# Altium PCB Buffer.PcbDoc
Units mm, origin at the board's own origin, x right, y up, seen from the top; angles counter-clockwise.
Board outline 23.37 x 19.3 mm, 2 copper layers (Top Layer, Bottom Layer); 9 components, 7 nets, 25 pads, 1 vias.
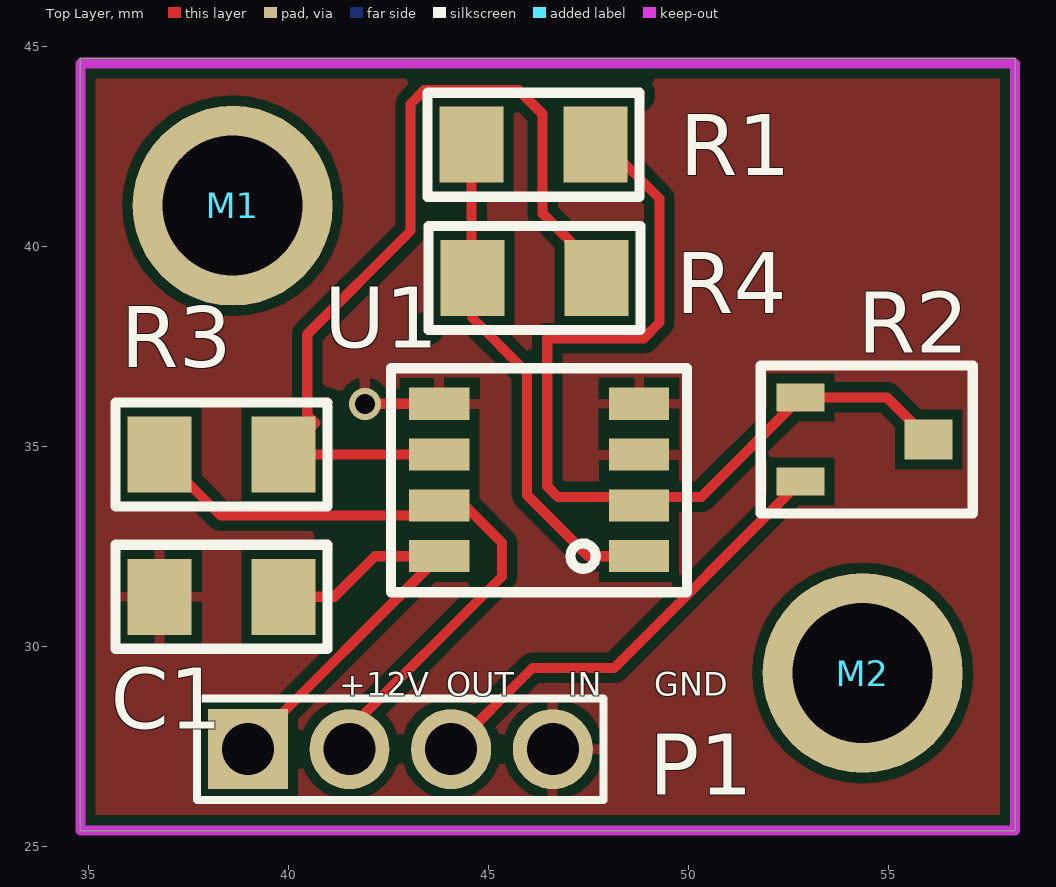
[diagram p0: Top Layer view]
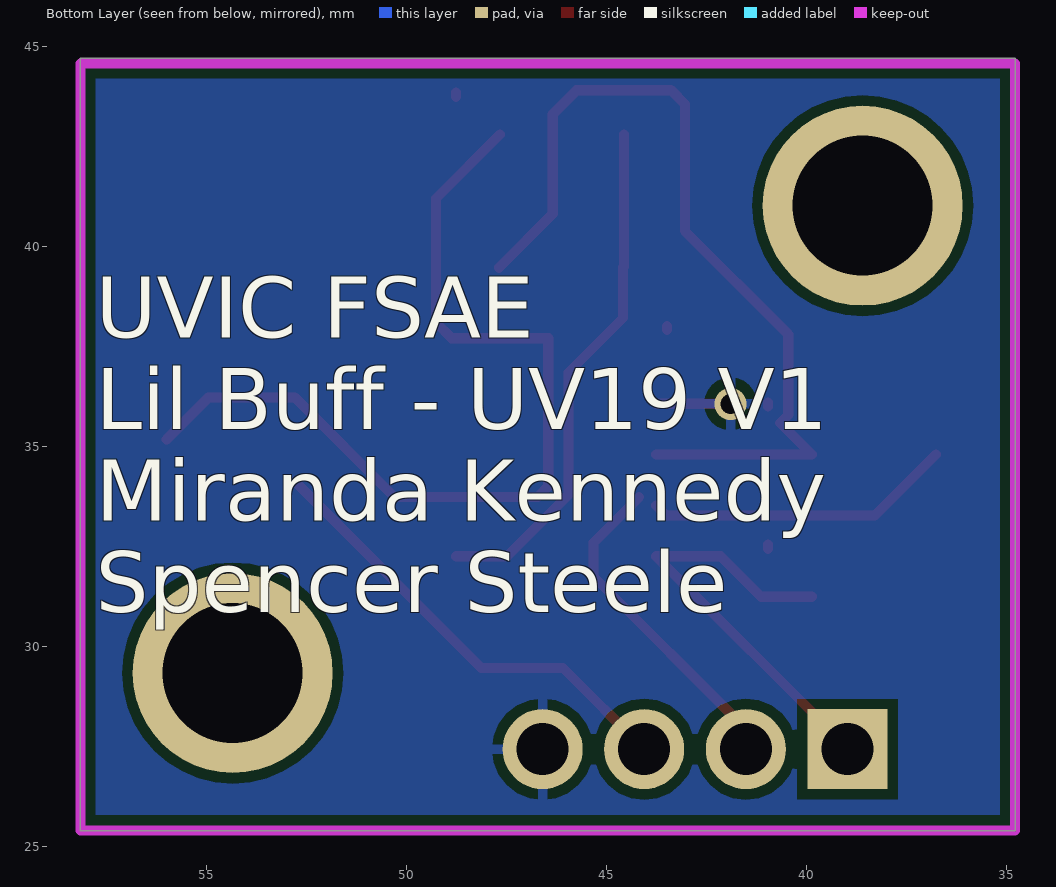
[diagram p1: Bottom Layer view, seen from below]

## Layer stack, top to bottom
Top Solder: solder mask 0.0102, Solder Resist, Dk 3.5
Top Layer: signal copper 0.0356
Dielectric 1: dielectric 0.32, FR-4, Dk 4.8
Bottom Layer: signal copper 0.0356
Bottom Solder: solder mask 0.0102, Solder Resist, Dk 3.5

## Board outline
34.798,25.4 58.166,25.4 58.166,44.704 34.798,44.704

## Design rules (kind name [scope] priority, off if disabled: settings)
Clearance [All] p1: gap=0.254 ignorepadtopadclearanceinfootprint=FALSE except(0: Arc-Hole Track-Hole SMDPad-Hole THPad-Hole Via-Hole Fill-Hole Poly-Hole Region-Hole Text-Hole)
PolygonConnect [All] p1: connectstyle=Relief reliefconductorwidth=0.254 reliefentries=4 polygonreliefangle="90 Angle" airgapwidth=0.254
RoutingVias [All] p1: holewidth=0.711 width=1.27 viastyle="Through Hole" minholewidth=0.711 minwidth=1.27 maxholewidth=0.711 maxwidth=1.27
SolderMaskExpansion [All] p1: expansion=0.102
Width [All] p1: maxlimit=0.254 minlimit=0.254 preferedwidth=0.254
30 further rules are at their usual default settings.

## Classes and differential pairs
component class Buffer: C1 P1 R1 R2 U1

## Components (designator, comment, footprint, x,y, rotation, side; value= is the part's Value field where it differs from the comment)
C1 "Cap Pol3" 1206 38.378,31.342 r180 top value=100pF
M1 "M3" "M3 Mounting Hole" 38.608,41.021 r0 top
M2 "M3" "M3 Mounting Hole" 54.356,29.337 r0 top
P1 "Header 4" HDR1X4 38.989,27.432 r0 top
R1 "Res3" 1206 46.177,42.645 r180 top value=10K
R2 "50K" POT 54.407,35.029 r270 top
R3 "Res3" 1206 38.378,34.898 r180 top value=1K
R4 "Res3" 1206 46.101,39.116 r0 top value=1K
U1 "Test" SO8 48.768,32.258 r90 top

## Footprints (in the part's own frame and the unit in brackets; to place one, negate y for a bottom-side part, rotate by r counter-clockwise, add the part's x,y. Pads: shape width x height; smd on the part's side, far side on the other; paste and mask are expansions set on the pad)
1206 [mm]
  rect 1.6x1.9 smd: 1(-1.5,0.1) 2(1.6,0.1)
  Top Layer lines w0.254: -2.6,-1.1 -2.6,-1.2
  silkscreen extent -2.6,-1.2 2.7,1.4
HDR1X4 [mm] "Connector; Header; 4 Position"
  rect 2x2 hole 1.3: 1(0,0)
  round 2 hole 1.3: 2(2.54,0) 3(5.08,0) 4(7.62,0)
  silkscreen extent -1.27,-1.27 8.89,1.27
"M3 Mounting Hole" [mm]
  round 5 hole 3.5: M3(0,0)
POT [mm] "ST32ETB103"
  rect 0.7x1.2 smd: CCW(-1.2,-1.6) CW(0.9,-1.6)
  rect 1x1.2 smd: W(-0.15,1.6)
  silkscreen extent -2,-2.6 1.7,2.7
SO8 [mm]
  rect 0.802x1.505 smd: 1(0,0) 2(1.27,0) 3(2.54,0) 4(3.81,0) 5(3.81,4.995) 6(2.54,4.995) 7(1.27,4.995) 8(0,4.995)
  silkscreen extent -0.9,-1.2 4.7,6.2

## Part data
C1: "Polarized Capacitor (Surface Mount)", LatestRevisionDate=29-May-2009, LatestRevisionNote="IPC-7351 Footprint Added.", PackageDescription="Chip Capacitor", PackageReference=C0805, Published=8-Jun-2000, Publisher="Altium Limited"
P1: "Header, 4-Pin", LatestRevisionDate=17-Jul-2002, LatestRevisionNote="Re-released for DXP Platform.", Publisher="Altium Limited"
R1 R3 R4: "Resistor", LatestRevisionDate=29-May-2009, LatestRevisionNote="IPC-7351 Footprint Added.", PackageDescription="Chip Resistor", PackageReference=J1-0603, Published=8-Jun-2000, Publisher="Altium Limited"
R2: library part "RPot SM", "Square Trimming Potentiometer", ComponentLink1Description="Manufacturer Link", ComponentLink1URL=http://bourns.com/2/search.html, DatasheetVersion=Oct-2003, PackageDescription="Square Trimming Potentiometer", PackageReference=POT4MM-2, Published=17-Dec-2003, Publisher="Altium Limited"

## Via types
v1: diameter 0.8, hole 0.5, Top Layer to Bottom Layer, 1 vias

## Nets (pads, with @x,y where several pads share a name; then routed paths per layer and width w, separated by ;. In a path a pad name is that pad's centre, name@x,y a point inside that pad or via, vN(x,y) a via of type N, cw(c..) or ccw(c..) an arc to the next point about the centre after c; other vN are vias at no path point)
+12: C1.1 P1.1 U1.8 | length 11.1
  Top Layer w0.254: P1.1 38.989,27.474 U1.8 42.164,32.258 41.148,31.242 C1.1
GND: C1.2 P1.4 U1.3 U1.4 U1.5 | length 1.9
  Top Layer w0.254: v1(41.91,36.068) U1.5
INPUT: P1.3 R2.CW | length 11.5
  Top Layer w0.254: P1.3 46.101,29.464 48.142,29.464 R2.CW
NetR1_1: R1.1 R2.CCW R2.W U1.2 | length 23.1
  Top Layer w0.254: R1.1@47.677,42.799 49.276,41.2 49.276,38.1 48.883,37.707 46.47,37.707 46.47,34.006 46.736,33.74 50.318,33.74 R2.CCW 54.957,36.229 R2.W
NetR1_2: R1.2 R4.1 U1.1 | length 13
  Top Layer w0.254: R1.2@44.577,42.799 44.577,39.494 44.601,39.47 44.601,38.211 45.962,36.85 45.962,33.795 47.499,32.258 U1.1
NetR3_1: R3.1 R4.2 U1.6 | length 22.2
  Top Layer w0.254: U1.6 R3.1 40.669,35.589 40.47,35.788 40.47,37.803 43.053,40.386 43.053,43.564 43.396,43.907 45.758,43.907 45.758,43.904 46.355,43.307 46.355,40.816 R4.2@47.701,39.47
OUTPUT: P1.2 R3.2 U1.7 | length 16.1
  Top Layer w0.254: R3.2 38.302,33.274 43.519,33.274 U1.7 ; P1.2 41.529,27.94 45.339,31.75 45.339,32.597 U1.7@44.196,33.74
pads on no net: M1.M3 M2.M3

## Polygon pours and split planes (outlines as drawn)
GND on Bottom Layer (solid, pour order 4): 34.925,44.577 34.798,44.45 34.798,25.4 58.039,25.4 58.166,25.527 58.039,25.654 58.039,44.577
GND on Top Layer "Top Layer-GND" (solid, pour order 2): 34.798,44.704 58.166,44.704 58.166,25.527 58.293,25.4 34.798,25.4

## Keep-outs
Keep-Out Layer:
  lines w0.254: 58.039,44.577 34.798,44.577 34.798,25.4 58.039,25.4 58.166,25.4 58.166,44.577

## Silkscreen, mask and mechanical layers (free items; w line width, h text height)
Top Overlay:
  text "+12V" at 41.275,28.575 h1
  text "OUT" at 43.942,28.575 h1
  text "IN" at 46.99,28.575 h1
  text "GND" at 49.149,28.575 h1
Bottom Overlay:
  text "UVIC FSAE / Lil Buff - UV19 V1 / Miranda Kennedy / Spencer Steele" at 57.785,30.861 h1.52